# Altium PCB CCP_PCB3.PcbDoc
Units mil, origin at the board's own origin, x right, y up, seen from the top; angles counter-clockwise.
Board outline 3910 x 2580 mil, 2 copper layers (Top Layer, Bottom Layer); 78 components, 61 nets, 295 pads, 33 vias.
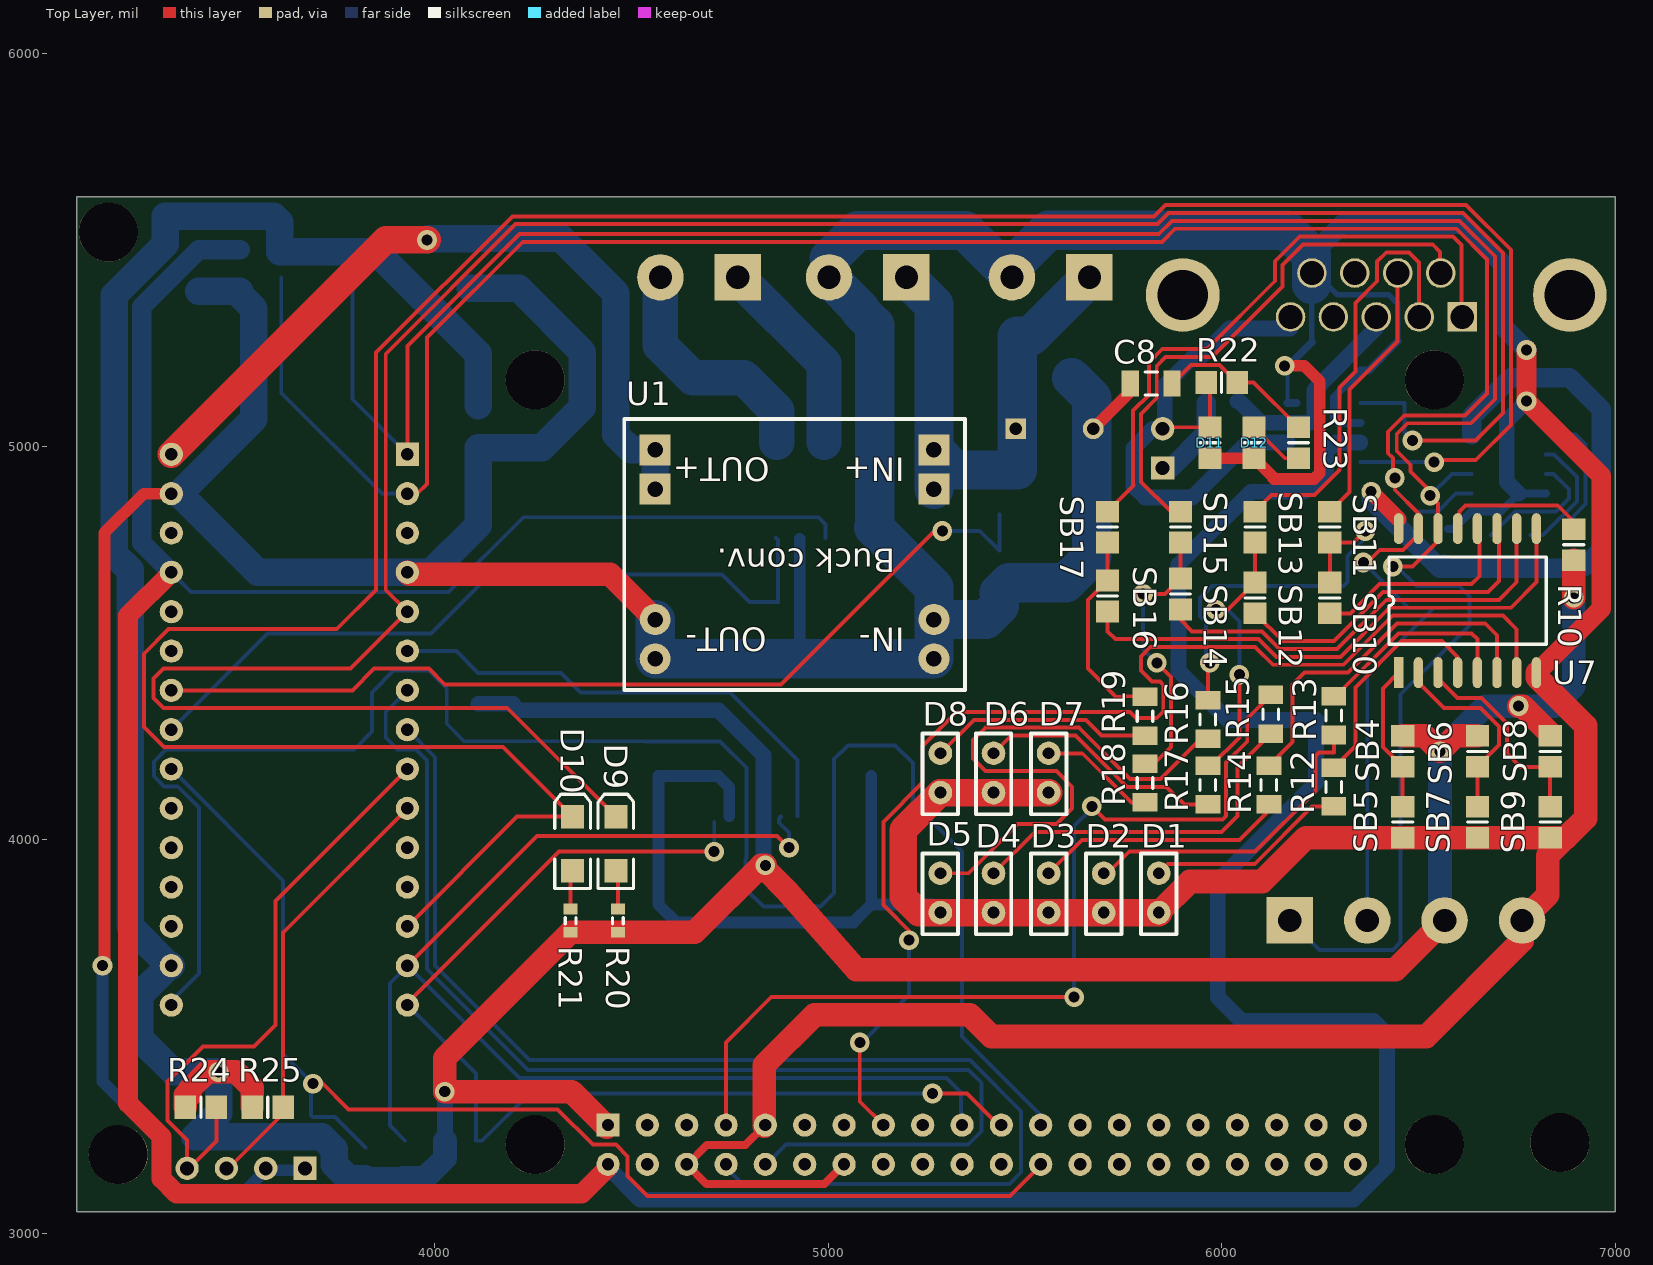
[diagram p0: Top Layer view]
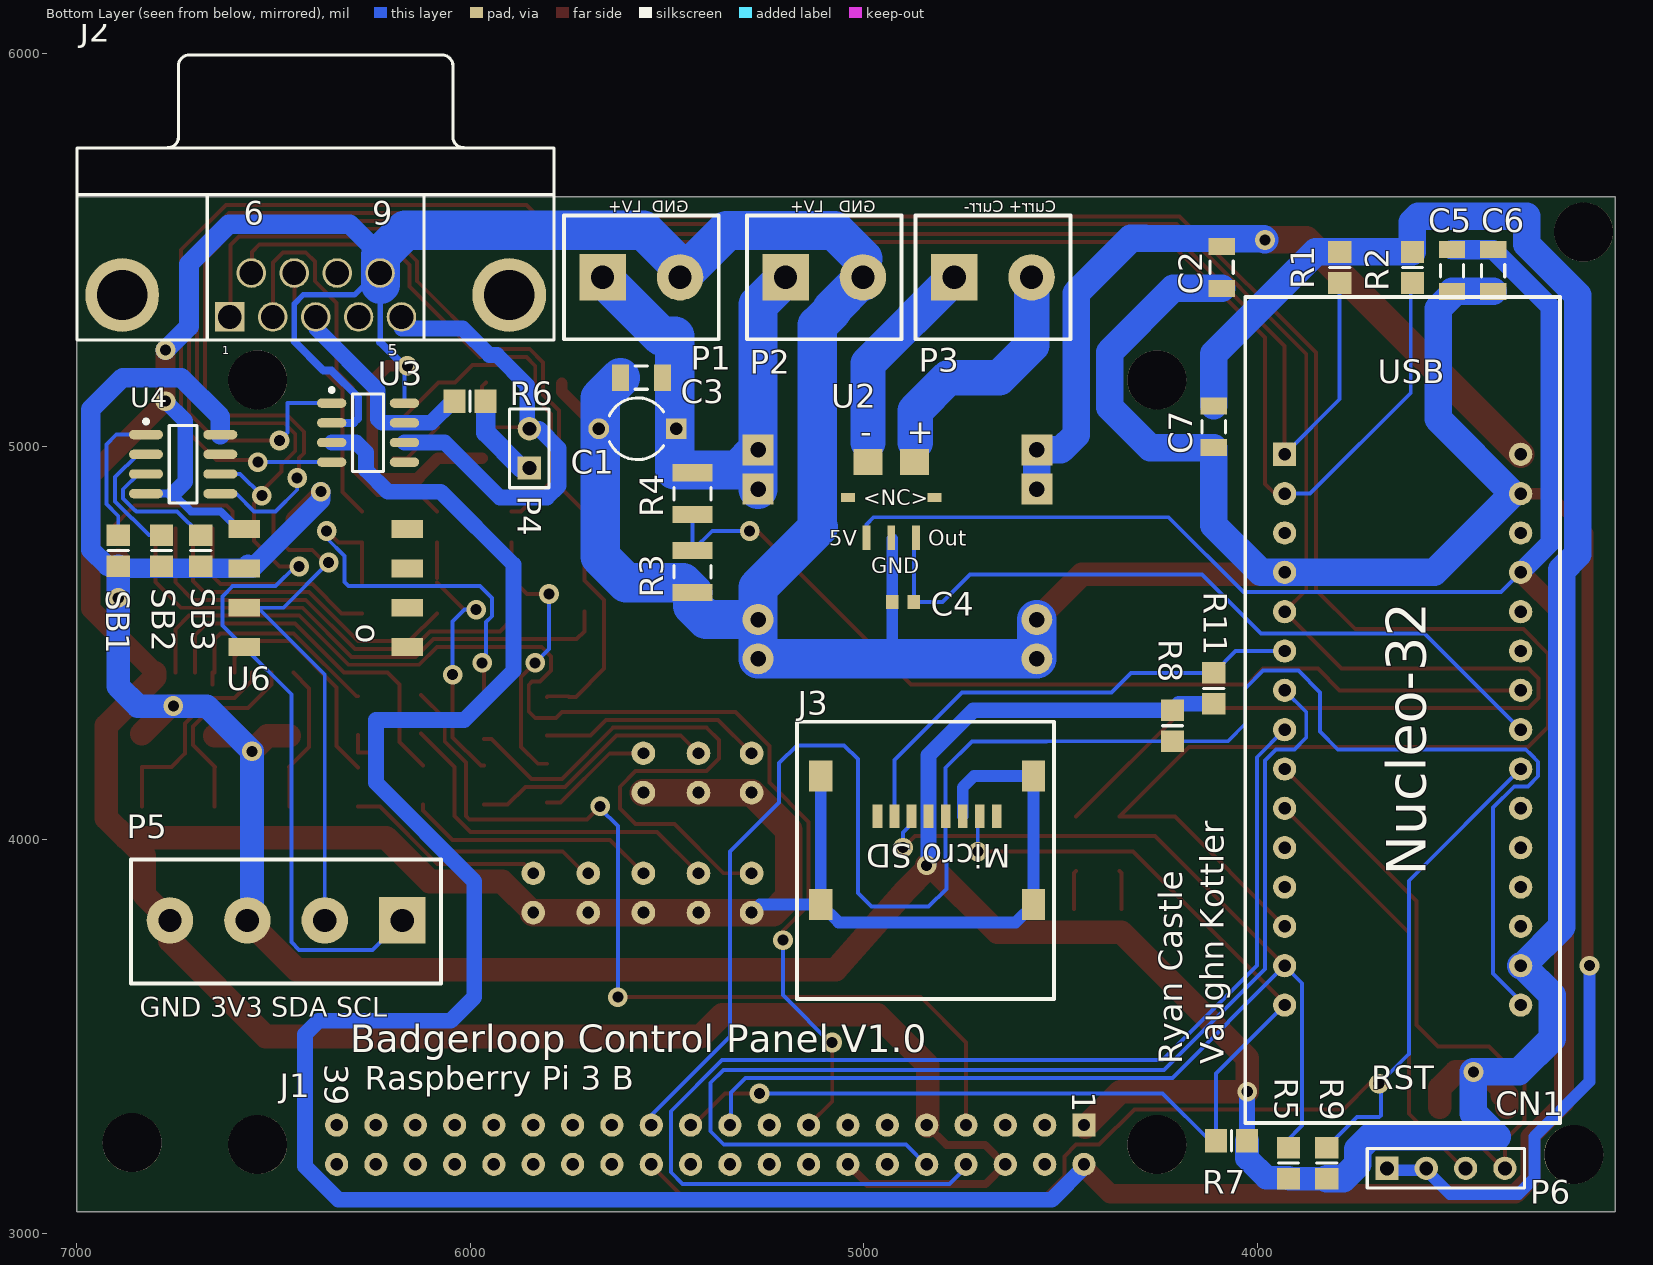
[diagram p1: Bottom Layer view, seen from below]

## Layer stack, top to bottom
Top Solder: solder mask 0.4, Solder Resist, Dk 3.5
Top Layer: signal copper 1.4
Dielectric 1: dielectric 12.6, FR-4, Dk 4.8
Bottom Layer: signal copper 1.4
Bottom Solder: solder mask 0.4, Solder Resist, Dk 3.5

## Board outline
3090,3055 7000,3055 7000,5635 3090,5635

## Design rules (kind name [scope] priority, off if disabled: settings)
Clearance [All] p1: gap=10 ignorepadtopadclearanceinfootprint=FALSE except(0: Arc-Hole Track-Hole SMDPad-Hole THPad-Hole Via-Hole Fill-Hole Poly-Hole Region-Hole Text-Hole)
HoleSize [All] p1: absolutevalues=TRUE maxlimit=200 minlimit=1 maxpercent=80.000 minpercent=20.000
PolygonConnect [All] p1: connectstyle=Relief reliefconductorwidth=10 reliefentries=4 polygonreliefangle="90 Angle" airgapwidth=10
RoutingVias [All] p1: holewidth=28 width=50 viastyle="Through Hole" minholewidth=28 minwidth=50 maxholewidth=28 maxwidth=50
SolderMaskExpansion [All] p1: expansion=4
Width [All] p1: maxlimit=150 minlimit=10 preferedwidth=10 minimp=50.000000 maximp=50.000000 favimp=50.000000
29 further rules are at their usual default settings.

## Classes and differential pairs
component class CCP_MCU: C1 C2 C3 C4 C5 C6 C8 CN1 D9 D10 D11 D12 J1 J2 P1 P2 P3 P4 R1 R2 R3 R4 R5 R6 R7 R8 R9 R20 R21 R22 R23 SB1 SB2 SB3 U1 U2 U3 U4
component class CCP_IO: C7 D1 D2 D3 D4 D5 D6 D7 D8 J3 P5 P6 R10 R11 R12 R13 R14 R15 R16 R17 R18 R19 R24 R25 SB4 SB5 SB6 SB7 SB8 SB9 SB10 SB11 SB12 SB13 SB14 SB15 SB16 SB17 U6 U7

## Components (designator, comment, footprint, x,y, rotation, side; value= is the part's Value field where it differs from the comment)
C1 "Cap" CAPR5-4X5 5575,5045 r0 bottom value=220uF
C2 "Cap" C1206 4090,5455 r90 bottom value=10uF
C3 "Cap" C1206 5565,5175 r180 bottom value=10uF
C4 "Cap Semi" 1608[0603] 4900,4605 r180 bottom value=100pF
C5 "Cap Semi" C1206 3504.44,5447.13 r270 bottom value=.1uF
C6 "Cap" C1206 3400,5447.13 r90 bottom value=10uF
C7 "Cap" C1206 4110,5050 r90 bottom value=10uF
C8 "Cap" C1206 5820.7,5160 r0 top value=10uF
CN1 "NUCLEO-L432KC" NUCLEO-32 3930,4980 r180 bottom
D1 "LED1" "2 Pin Jumper" 5840,3915 r270 top
D2 "LED1" "2 Pin Jumper" 5700,3915 r270 top
D3 "LED1" "2 Pin Jumper" 5560,3915 r270 top
D4 "LED1" "2 Pin Jumper" 5420,3915 r270 top
D5 "LED1" "2 Pin Jumper" 5285,3915 r270 top
D6 "LED1" "2 Pin Jumper" 5420,4220 r270 top
D7 "LED1" "2 Pin Jumper" 5560,4220 r270 top
D8 "LED1" "2 Pin Jumper" 5285,4220 r270 top
D9 "LED2" 3.2X1.6X1.1 4460,3990 r90 top
D10 "LED2" 3.2X1.6X1.1 4350,3990 r90 top
D11 "ESD DIODE" 6-0805_M 5970,5009.37 r90 top
D12 "ESD DIODE" 6-0805_M 6082.37,5009.37 r90 top
J1 "Raspberry Pi" "RASPBERRY PI - CCP OUTLINE" 6580,3615 r270 bottom
J2 "D Connector 9" DSUB1.385-2H9 6393.07,5759.02 r180 bottom
J3 "uSD" MICRO_SD_HOLDER 4661.77,4060 r0 bottom
P1 "V_BATT" "2POS TERM BLOCK" 5663.7,5430 r180 bottom
P2 "NAP" "2POS TERM BLOCK" 5198.7,5430 r180 bottom
P3 "Header 2H" "2POS TERM BLOCK" 4770,5430 r180 bottom
P4 "TERM" HDR1X2 5850,4945 r90 bottom
P5 "Header 4" "4POS TERM BLOCK" 6173.15,3795 r0 bottom
P6 "Header 4" HDR1X4 3670,3165 r180 bottom
R1 "Res1" 6-0805_M 3790,5455 r90 bottom value=1K
R2 "Res1" 6-0805_M 3605,5455 r90 bottom value=1K
R3 "SMD 1210" 14-1210 5435,4681.85 r270 bottom value=1K
R4 "SMD 1210" 14-1210 5435,4880 r270 bottom value=4.5K
R5 "Res1" 6-0805_M 3920,3178.13 r90 bottom value=47K
R6 "Res1" 6-0805_M 6000.63,5115 r0 bottom value=120
R7 "Res1" 6-0805_M 4065,3235 r0 bottom value=47K
R8 "Res1" 6-0805_M 4215,4290 r270 bottom value=47K
R9 "Res1" 6-0805_M 3823.13,3178.13 r270 bottom value=47K
R10 "Res1" 6-0805_M 6895,4750 r270 top value=10K
R11 "Res1" 6-0805_M 4110,4385 r90 bottom value=10K
R12 "Res1" 1206 6285,4085 r90 top value=1K
R13 "Res1" 1206 6285,4266.57 r90 top value=1K
R14 "Res1" 1206 6120,4090 r90 top value=1K
R15 "Res1" 1206 6125,4270 r90 top value=1K
R16 "Res1" 1206 5965,4256.57 r90 top value=1K
R17 "Res1" 1206 5965,4090 r90 top value=1K
R18 "Res1" 1206 5805,4095 r90 top value=1K
R19 "Res1" 1206 5805,4265 r90 top value=1K
R20 "Res3" J1-0603 4465,3794.53 r90 top value=1K
R21 "Res3" J1-0603 4345,3794.53 r90 top value=1K
R22 "Res1" 6-0805_M 6000,5162.4 r180 top value=120
R23 "Res1" 6-0805_M 6195,5009.37 r270 top value=120
R24 "Res1" 6-0805_M 3405,3320 r180 top value=2K
R25 "Res1" 6-0805_M 3575,3320 r180 top value=2K
SB1 "Res1" 6-0805_M 6895,4735 r270 bottom value=0
SB2 "Res1" 6-0805_M 6785,4735 r270 bottom value=0
SB3 "Res1" 6-0805_M 6685,4735 r270 bottom value=0
SB4 "Res1" 6-0805_M 6460,4225 r90 top value=0
SB5 "Res1" 6-0805_M 6460,4045 r90 top value=0
SB6 "Res1" 6-0805_M 6650,4225 r90 top value=0
SB7 "Res1" 6-0805_M 6650,4045 r90 top value=0
SB8 "Res1" 6-0805_M 6835,4225 r90 top value=0
SB9 "Res1" 6-0805_M 6835,4045 r90 top value=0
SB10 "Res1" 6-0805_M 6275,4615 r270 top value=0
SB11 "Res1" 6-0805_M 6275,4795 r270 top value=0
SB12 "Res1" 6-0805_M 6085,4615 r270 top value=0
SB13 "Res1" 6-0805_M 6085,4795 r270 top value=0
SB14 "Res1" 6-0805_M 5895,4625 r270 top value=0
SB15 "Res1" 6-0805_M 5895,4795 r270 top value=0
SB16 "Res1" 6-0805_M 5710,4620 r270 top value=0
SB17 "Res1" 6-0805_M 5710,4795 r270 top value=0
U1 "MP1584EN Breakout Board" "MP1584EN BREAKOUT" 5268.66,4460 r180 top
U2 "ACS780xLR" "7-PIN PSOF" 4930,4870 r180 bottom
U3 "MCP2561" SO8_L 6260,5035 r180 bottom
U4 "CAT24C32" SO8_N 6730,4955 r180 bottom
U6 "SSCMNNN030PA2A3" 8-SMT 6160.04,4790 r270 bottom
U7 "PCF8574" 16-SOIC 6450,4425 r90 top

## Footprints (in the part's own frame and the unit in brackets; to place one, negate y for a bottom-side part, rotate by r counter-clockwise, add the part's x,y. Pads: shape width x height; smd on the part's side, far side on the other; paste and mask are expansions set on the pad)
"2 Pin Jumper" [mil]
  round 60 hole 30: 1(0,0) 2(100,0)
  silkscreen extent -50,-45 155,45, body extent -50,-51 150,45, height 344
"2POS TERM BLOCK" [mm] "5mm Pitch"
  rect 3x3 hole 1.5: 1(0,0)
  round 3 hole 1.5: 2(5,0)
  silkscreen extent -2.5,-4 7.5,4, body extent -2.51,-4.57 8.09,4.43, height 12.6
3.2X1.6X1.1 [mm] "SMT LED; 2 Flat Leads"
  rect 1.5x1.5 smd: 1(-1.75,0) 2(1.75,0)
  silkscreen extent -2.9,-1.15 3.2,1.15
"4POS TERM BLOCK" [mm]
  rect 3x3 hole 1.5: 1(0,0)
  round 3 hole 1.5: 2(5,0) 3(10,0) 4(15,0)
  silkscreen extent -2.5,-3.94 17.5,4.06, body extent -2.55,-4.56 18.05,4.44, height 3.8
6-0805_M [mm] "Chip Resistor, Body 2.0x1.2mm, IPC Low Density"
  rect 1.4x1.5 smd: 1(-1,0) 2(1,0)
  silkscreen extent 0,-0.65 0,0.65, body extent -1.07,-0.7 1.07,0.7, height 0.7
"7-PIN PSOF" [mm] "ACS780xLR"
  rect 0.5x1.6 smd: 1(-1.6,-2.6) 2(0,-2.6) 3(1.6,-2.6)
  rect 0.9x0.6 smd: 4(2.8,0) 7(-2.8,0)
  rect 1.9x1.7 smd: 5(1.5,2.3) 6(-1.5,2.3)
8-SMT [mm]
  rect 1.15x2.04 smd: 1(0,-10.54) 2(2.54,-10.54) 3(5.08,-10.54) 4(7.62,-10.54) 5(7.62,0) 6(5.08,0) 7(2.54,0) 8(0,0)
  body extent -1.35,-12 8.55,1.46, height 5.44
14-1210 [mm] "Chip Resistor, Body 3.2x2.5mm, IPC High Density"
  rect 1.1x2.6 smd: 1(-1.35,0) 2(1.35,0)
  silkscreen extent -0.4,-1.2 0.4,1.2, body extent -1.68,-1.32 1.68,1.32, height 0.9
16-SOIC [mm]
  rect 2x0.6 smd: 1(0,0)
  oval 2x0.6 smd: 2(0,-1.27) 3(0,-2.54) 4(0,-3.81) 5(0,-5.08) 6(0,-6.35) 7(0,-7.62) 8(0,-8.89) 9(9.3,-8.89) 10(9.3,-7.62) 11(9.3,-6.35) 12(9.3,-5.08) 13(9.3,-3.81) 14(9.3,-2.54) 15(9.3,-1.27) 16(9.3,0)
  silkscreen extent 1.84,-9.53 7.46,0.64
1206 [mm] "1206 SMD Resistor"
  rect 1.2x1.6 smd: 1(0,0) 2(2.5,0)
  silkscreen extent 0.9,-0.5 1.6,0.5
1608[0603] [mm] "Chip Capacitor, Body 1.6x0.8mm, IPC High Density"
  rect 0.8x0.9 smd: 1(-0.7,0) 2(0.7,0)
  body extent -0.87,-0.48 0.87,0.48, height 1.3
C1206 [mm] "Chip Capacitor, Body 3.2x1.6mm, IPC High Density"
  rect 1.1x1.7 smd: 1(-1.35,0) 2(1.35,0)
  silkscreen extent -0.4,-0.75 0.4,0.75, body extent -1.7,-0.9 1.7,0.9, height 1.3
CAPR5-4X5 [mm] "Capacitor; 2 Leads"
  rect 1.35x1.35 hole 0.8: 1(-2.5,0)
  round 1.35 hole 0.8: 2(2.5,0)
  silkscreen extent -1.69,-2 1.82,2
DSUB1.385-2H9 [mm] "Connector; D Subminiature; 9 Position; Right Angle; Pitch 1.385 mm"
  rect 1.905x1.905 hole 1.524: 1(-5.54,-10.92)
  round 1.905 hole 1.524: 2(-2.77,-10.92) 3(0,-10.92) 4(2.77,-10.92) 5(5.54,-10.92) 6(-4.155,-8.08) 7(-1.385,-8.08) 8(1.385,-8.08) 9(4.155,-8.08)
  round 4.76 hole 3.26 unplated: 10(-12.495,-9.5) 11(12.495,-9.5)
  silkscreen extent -15.4,-12.4 15.4,6
HDR1X2 [mm] "Connector; Header; 2 Position"
  rect 1.5x1.5 hole 0.9: 1(0,0)
  round 1.5 hole 0.9: 2(2.54,0)
  silkscreen extent -1.27,-1.27 3.81,1.27
HDR1X4 [mm] "Connector; Header; 4 Position"
  rect 1.5x1.5 hole 0.9: 1(0,0)
  round 1.5 hole 0.9: 2(2.54,0) 3(5.08,0) 4(7.62,0)
  silkscreen extent -1.27,-1.27 8.89,1.27
J1-0603 [mm] "Chip Resistor, Body 1.6x0.8mm, IPC High Density"
  rect 0.7x0.9 smd: 1(-0.75,0) 2(0.75,0)
  silkscreen extent -0.2,-0.35 0.2,0.35, body extent -0.85,-0.48 0.85,0.48, height 0.9
MICRO_SD_HOLDER [mm]
  rect 0.63x1.5 smd: 1(7.7,0) 2(6.6,0) 3(5.5,0) 4(4.4,0) 5(3.3,0) 6(2.2,0) 7(1.1,0) 8(0,0)
  rect 1.5x2 smd: 9(-2.38,-2.6) 9(-2.38,5.7) 9(11.37,-2.6) 9(11.37,5.7)
  silkscreen extent -3.7,-6.1 12.9,11.8
"MP1584EN BREAKOUT" [mm] "Buck Converter"
  round 2 hole 1: 0(0,0) 0(0,-2.54) 2(18,-2.54) 2(18,0)
  rect 2x2 hole 1: 1(0,-10.96) 1(0,-13.5) 3(18,-10.96) 3(18,-13.5)
  silkscreen extent -2,-15.5 20,2
NUCLEO-32 [mm]
  rect 1.5x1.5 hole 0.8: 1(0,0)
  round 1.5 hole 0.8: 2(0,-2.54) 3(0,-5.08) 4(0,-7.62) 5(0,-10.16) 6(0,-12.7) 7(0,-15.24) 8(0,-17.78) 9(0,-20.32) 10(0,-22.86) 11(0,-25.4) 12(0,-27.94) 13(0,-30.48) 14(0,-33.02) 15(0,-35.56) 16(15.24,-35.56) 17(15.24,-33.02) 18(15.24,-30.48) 19(15.24,-27.94) 20(15.24,-25.4) 21(15.24,-22.86) 22(15.24,-20.32) 23(15.24,-17.78) 24(15.24,-15.24) 25(15.24,-12.7) 26(15.24,-10.16) 27(15.24,-7.62) 28(15.24,-5.08) 29(15.24,-2.54) 30(15.24,0)
  silkscreen extent -2.54,-43.18 17.78,10.16, body extent -1.67,-40.6 16.87,9.69, height 5
"RASPBERRY PI - CCP OUTLINE" [mm]
  rect 1.5x1.5 hole 0.8: 1(8.636,54.356)
  round 1.5 hole 0.8: 2(11.176,54.356) 3(8.636,51.816) 4(11.176,51.816) 5(8.636,49.276) 6(11.176,49.276) 7(8.636,46.736) 8(11.176,46.736) 9(8.636,44.196) 10(11.176,44.196) 11(8.636,41.656) 12(11.176,41.656) 13(8.636,39.116) 14(11.176,39.116) 15(8.636,36.576) 16(11.176,36.576) 17(8.636,34.036) 18(11.176,34.036) 19(8.636,31.496) 20(11.176,31.496) 21(8.636,28.956) 22(11.176,28.956) 23(8.636,26.416) 24(11.176,26.416) 25(8.636,23.876) 26(11.176,23.876) 27(8.636,21.336) 28(11.176,21.336) 29(8.636,18.796) 30(11.176,18.796) 31(8.636,16.256) 32(11.176,16.256) 33(8.636,13.716) 34(11.176,13.716) 35(8.636,11.176) 36(11.176,11.176) 37(8.636,8.636) 38(11.176,8.636) 39(8.636,6.096) 40(11.176,6.096)
  round 3.81 hole 3.81 unplated: H(9.906,1.005) H(9.906,59.066)
  body extent -44.83,-24.43 13.52,62.57, height 18.23
SO8_L [mm] "SOIC, 8-Leads, Body 4.9x3.9mm, Pitch 1.27mm, IPC High Density"
  oval 1.9x0.6 smd: 1(-2.35,1.905) 2(-2.35,0.635) 3(-2.35,-0.635) 4(-2.35,-1.905) 5(2.35,-1.905) 6(2.35,-0.635) 7(2.35,0.635) 8(2.35,1.905)
  silkscreen extent -2.48,-2.5 1,2.88, body extent -2,-2.5 2,2.5, height 1.75
SO8_N [mm] "SOIC, 8-Leads, Body 4.9x3.9mm, Pitch 1.27mm, IPC Medium Density"
  oval 2.2x0.6 smd: 1(-2.4,1.905) 2(-2.4,0.635) 3(-2.4,-0.635) 4(-2.4,-1.905) 5(2.4,-1.905) 6(2.4,-0.635) 7(2.4,0.635) 8(2.4,1.905)
  silkscreen extent -2.53,-2.5 0.9,2.88, body extent -2,-2.5 2,2.5, height 1.75

## Part data
C1 C2 C3 C6 C7 C8: "Capacitor", LatestRevisionDate=17-Jul-2002, LatestRevisionNote="Re-released for DXP Platform.", PackageDescription="Radial Cap, Thru-Hole; 2 Leads; 0.3 in Pin Spacing", PackageReference=RAD-0.3, Published=8-Jun-2000, Publisher="Altium Limited"
C4 C5: "Capacitor (Semiconductor SIM Model)", LatestRevisionDate=29-May-2009, LatestRevisionNote="IPC-7351 Footprint Added.", PackageDescription="Chip Capacitor", PackageReference=C1206, Published=8-Jun-2000, Publisher="Altium Limited"
CN1: "STM32L432KC Development Board", ComponentLink1Description=MBED, ComponentLink1URL=https://os.mbed.com/platforms/ST-Nucleo-L432KC/, ComponentLink2Description=Digikey, ComponentLink2URL=https://www.digikey.com/products/en?keywords=NUCLEO-L432KC
D1 D2 D3 D4 D5 D6 D7 D8: "Typical RED GaAs LED", LatestRevisionDate=08-Jul-2005, LatestRevisionNote="Mech Layer 1 removed.", PackageDescription="LED; 2 Leads", PackageReference=LED-1, Published=8-Jun-2000, Publisher="Altium Limited"
D9 D10: "Typical RED, GREEN, YELLOW, AMBER GaAs LED", LatestRevisionDate=17-Jul-2002, LatestRevisionNote="Re-released for DXP Platform.", PackageDescription="SM LED; 2 Flat Leads", PackageReference=3.2X1.6X1.1, PackageVersion=Feb-2002, Published=8-Jun-2000, Publisher="Altium Limited"
D11 D12: library part "D Zener", "Zener Diode", LatestRevisionDate=17-Jul-2002, LatestRevisionNote="Re-released for DXP Platform.", PackageDescription="Diode, Thru-Hole; 2 Leads; 0.7 in Pin Spacing", PackageReference=DIODE-0.7, Published=8-Jun-2000, Publisher="Altium Limited"
J1: "2x20 Header"
J2: "Receptacle Assembly, 9 Position, Right Angle", PackageDocument=O, DatasheetDocument=1-Sep-1999, Gender=Receptacle, LatestRevisionDate=17-Jul-2002, LatestRevisionNote="Re-released for DXP Platform.", Orientation="Right Angle", PackageReference=788750, Positions=9, Published=15-Jun-2001, Publisher="Altium Limited"
J3: library part "SD Card"
P1 P2 P4: library part "Header 2", "Header, 2-Pin", LatestRevisionDate=17-Jul-2002, LatestRevisionNote="Re-released for DXP Platform.", Publisher="Altium Limited"
P3: "Header, 2-Pin, Right Angle", LatestRevisionDate=17-Jul-2002, LatestRevisionNote="Re-released for DXP Platform.", Publisher="Altium Limited"
P5 P6: "Header, 4-Pin", LatestRevisionDate=17-Jul-2002, LatestRevisionNote="Re-released for DXP Platform.", Publisher="Altium Limited"
R1 R2 R5 R6 R7 R8 R9 R10 R11 R12 R13 R14 R15 R16 R17 R18 R19 R20 R21 R22 R23 R24 R25 SB1 SB2 SB3 SB4 SB5 SB6 SB7 SB8 SB9 SB10 SB11 SB12 SB13 SB14 SB15 SB16 SB17: "Resistor", Published=8-Jun-2000, Publisher="Altium Limited"
  R1 R2 R5 R6 R7 R8 R9 R10 R11 R12 R13 R14 R15 R16 R17 R18 R19 R22 R23 R24 R25 SB1 SB2 SB3 SB4 SB5 SB6 SB7 SB8 SB9 SB10 SB11 SB12 SB13 SB14 SB15 SB16 SB17: LatestRevisionDate=17-Jul-2002, LatestRevisionNote="Re-released for DXP Platform.", PackageDescription="Axial Device, Thru-Hole; 2 Leads; 0.3 in Pin Spacing", PackageReference=AXIAL-0.3
  R20 R21: LatestRevisionDate=29-May-2009, LatestRevisionNote="IPC-7351 Footprint Added.", PackageDescription="Chip Resistor", PackageReference=J1-0603
R3 R4: library part Res1, "Resistor", LatestRevisionDate=17-Jul-2002, LatestRevisionNote="Re-released for DXP Platform.", PackageDescription="Axial Device, Thru-Hole; 2 Leads; 0.3 in Pin Spacing", PackageReference=AXIAL-0.3, Published=8-Jun-2000, Publisher="Altium Limited"
U1: "Buck Converter", ComponentLink1Description=Part, ComponentLink1URL=https://www.amazon.com/eBoot-MP1584EN-Converter-Adjustable-Module/dp/B01MQGMOKI/
U2: "Hall-Effect Current Sensor", ComponentLink1Description=Part, ComponentLink1URL=https://www.digikey.com/product-detail/en/allegro-microsystems-llc/ACS780LLRTR-050B-T/620-1817-1-ND/6189106
U3: "CAN Transciever", ComponentLink1Description=Part, ComponentLink1URL=https://www.digikey.com/product-detail/en/microchip-technology/MCP2561-E-SN/MCP2561-E-SN-ND/4079961, ComponentLink2Description=Datasheet, ComponentLink2URL=http://ww1.microchip.com/downloads/en/DeviceDoc/20005167C.pdf
U4: "I2C EEPROM", ComponentLink1Description=Part, ComponentLink1URL=https://www.digikey.com/product-detail/en/on-semiconductor/CAT24C32WI-GT3/CAT24C32WI-GT3CT-ND/1631159, ComponentLink2Description=Datasheet, ComponentLink2URL=http://www.onsemi.com/pub/Collateral/CAT24C32-D.PDF
U6: "Honeywell Digital Pressure Sensor", ComponentLink1Description=Part, ComponentLink1URL=https://www.digikey.com/product-detail/en/honeywell-sensing-and-productivity-solutions/SSCMNNN030PA2A3/480-6407-ND/2416123, ComponentLink2Description=Datasheet, ComponentLink2URL=https://sensing.honeywell.com/index.php?ci_id=151134
U7: "I2C I/O Expander", ComponentLink1Description=Part, ComponentLink1URL=https://www.digikey.com/product-detail/en/texas-instruments/PCF8574DWR/296-13108-1-ND/484579, ComponentLink2Description=Datasheet, ComponentLink2URL=http://www.ti.com/lit/ds/symlink/pcf8574.pdf

## Free pads (board coordinates)
  round 150 hole 150 unplated: H(3170,5545) H(3195,3200) H(4254.57,5169) H(6540.43,5169) H(6860,3230)

## Via types
v1: diameter 50, hole 28, Top Layer to Bottom Layer, 33 vias

## Nets (pads, with @x,y where several pads share a name; then routed paths per layer and width w, separated by ;. In a path a pad name is that pad's centre, name@x,y a point inside that pad or via, vN(x,y) a via of type N, cw(c..) or ccw(c..) an arc to the next point about the centre after c; other vN are vias at no path point)
CAN1_H: J2.3 R6.2 U3.7 | length 516.9
  Bottom Layer w40: R6.2 6045,5115 6100,5060 U3.7 6225,5060 6235,5070 6235,5143.11 J2.3@6391.89,5300
CAN1_L: D11.2 J2.5 P4.2 R22.2 U3.6 | length 1383.6
  Top Layer w10: P4.2 5853.74,5048.74 D11.2 5970,5153.03 R22.2
  Bottom Layer w10: P4.2 P4.2@5855,5050
  Bottom Layer w40: P4.2 5825,5045 5775,4995 5775,4900 5805,4870 5925,4870 6065,5010 U3.6 ; P4.2@5855,5050 5855,5155 5932.2,5232.2 5951.2,5232.2 6018.99,5300 J2.5@6173.78,5300
CAN1_RX: CN1.13 D10.2 U3.4 | length 7130.5
  Top Layer w10: CN1.13 4208.9,4058.9 D10.2 4173.43,4235.47 3311.56,4235.47 3260,4287.03 3260,4472.97 3322.5,4535.47 3750.47,4535.47 3850,4635 3850,5238.28 4196.72,5585 5828.43,5585 5856.84,5613.41 6621.59,5613.41 6735,5500 6735,5055 6645,4965 6540,4965 6535,4960 v1(6540,4960)
  Bottom Layer w10: U3.4 v1(6540,4960)
CAN1_TX: CN1.5 D9.2 U3.1 | length 6655
  Top Layer w10: D9.2 4183.9,4335 3310,4335 3285,4360 3285,4410 3310.47,4435.47 3785.47,4435.47 CN1.5 3875,4635 3875,5235 4205,5565 5836.72,5565 5865.12,5593.41 6613.31,5593.41 6715,5491.72 6715,5085 6645,5015 v1(6485,5015)
  Bottom Layer w10: U3.1 6465,5110 6465,5035 v1(6485,5015)
CURR_SENSE: C4.2 CN1.23 U2.3 | length 1899.9
  Bottom Layer w10: CN1.23 3574.53,4524.53 3989.53,4524.53 4140,4675 4730,4675 4800,4605 C4.2 4872.44,4762.2 U2.3
GND: C1.2 C2.1 C3.1 C4.1 C5.2 C6.1 C7.1 C8.1 CN1.4 CN1.29 D1.2 D2.2 D3.2 D4.2 D5.2 D6.2 D7.2 D8.2 D11.1 D12.1 J1.6 J1.9 J1.14 J2.9 J3.6 J3.9 P1.2 P2.2 P5.4 P6.1 P6.2 R3.2 SB5.1 SB7.1 SB9.1 U1.0 U1.2 U2.2 U3.2 U3.8 U4.4 U6.1 U7.8 | length 22218
  Top Layer w10: J1.6 J1.6@4641.12,3173.88 ; 6130,4920 6130,4922.37 ; P5.4@6763.7,3743.7 P5.4
  Top Layer w20: J1.6@4637.24,3170 J1.6@4641.12,3173.88 ; J1.9 4837.24,3272.24 4789.53,3224.53 4691.77,3224.53 J1.6@4641.12,3173.88 ; J1.14 4990,3125 4690,3125 J1.6@4641.12,3173.88
  Top Layer w30: v1(3155,3680) 3160,3685 3160,4780 3260,4880 CN1.29 ; C1.2 5767.55,5139.12 C8.1 ; D11.1 D12.1 6130,4922.37 ; 6130,4920 6132.56,4917.44 6235.01,4917.44 6235.01,4917.57 6249.53,4932.09 6249.53,5165.47 6210,5205 v1(6160,5205)
  Top Layer w50: v1(6775,5245) v1(6775,5115) 6965,4925 6965,4588.19 U7.8@6801.81,4425
  Top Layer w60: CN1.4 3935,4675 4445,4675 U1.2@4560,4560 ; J1.9@4837.24,3272.24 4837.24,3427.24 4965,3555 5360,3555 5415,3500 6520,3500 P5.4@6763.7,3743.7 ; D1.2 5919.06,3894.06 6102.69,3894.06 6214.27,4005.63 SB5.1 SB7.1 SB9.1 6874.37,4005.63 ; P5.4 6828.7,3860 6828.7,3959.96 6874.37,4005.63 ; U7.8@6801.81,4425 6801.81,4413.19 6925,4290 6925,4055 6875.63,4005.63 6874.37,4005.63
  Top Layer w70: D7.2 D6.2 D8.2 5190,4025 5190,3855 5230,3815 D5.2 D4.2 D3.2 D2.2 D1.2
  Bottom Layer w10: 4927.56,4462.44 4930,4460 ; U2.2@4927.56,4765.2 U2.2 ; P2.2@5001.85,5420 P2.2 P2.2@5001.85,5476.85 ; D5.2@5264.41,3835.59 D5.2 ; P1.2 P1.2@5466.85,5431.85 ; v1(6160,5205) 6167.48,5197.52 U3.8 ; J2.9 J2.9@6239.09,5440.91
  Bottom Layer w14: J2.9@6228.31,5411.81 6229.19,5410.93 6229.46,5410.93 6229.46,5302.28 6229.19,5302.01 6229.19,5265 ; J2.9@6239.09,5440.91 6295,5385 6425,5385 6447.63,5362.37 6447.63,5306.47 6447.68,5306.42 6447.68,5267.32
  Bottom Layer w20: v1(6160,5205) 6169.19,5205 6229.19,5265 ; U3.8 U3.8@6189.88,5110 ; U3.2 6296.08,5060 6285,5071.08 6285,5125 6352.64,5192.64 6372.99,5192.64 6447.68,5267.32 ; U6.1 6590,4790 6635,4835 6710.27,4835 6755.27,4880 U4.4
  Bottom Layer w30: v1@3155,3660 3155,3385 3295,3245 3295,3140 3335,3100 3510,3100 3570,3160 P6.1@3670,3160 ; J3.6 4748.39,4133.39 4719.41,4162.36 4568.07,4162.36 4568.07,3835.59 4613.66,3790 5063.82,3790 J3.9@5109.41,3835.59 ; 4927.56,4462.44 C4.1 U2.2@4927.56,4765.2 ; J3.9@5109.41,4162.36 J3.9@5109.41,3835.59 ; D5.2@5264.41,3835.59 J3.9@5109.41,3835.59
  Bottom Layer w40: 6755.27,4880 6725,4910.27 6725,5065 v1(6775,5115)
  Bottom Layer w50: 6228.31,5486.69 6306.61,5565 6613.43,5565 6715,5463.43 6715,5305 v1(6775,5245)
  Bottom Layer w70: C6.1 C5.2@3496.02,5393.98 ; C5.2 C5.2@3496.02,5393.98 ; C2.1 4213.15,5401.85 4375,5240 4375,5100 4271.85,4996.85 C7.1 4110,4800 3990,4680 CN1.4 3550,4680 3350,4880 3540,5070 3540,5350 C5.2@3496.02,5393.98
  Bottom Layer w100: U1.2@4560,4560 4560,4460 4930,4460 5268.66,4460 U1.0@5268.66,4560 ; P2.2@5001.85,5420 5010,5420 5079.65,5350.35 5079.65,5346.09 5117.95,5307.78 5117.95,4797.95 5115,4795 5268.66,4641.34 U1.0@5268.66,4560 ; P2.2@5001.85,5476.85 5074.06,5549.06 5347.8,5549.06 P1.2 ; 5435,4595 5400,4560 U1.0@5268.66,4560 ; R3.2 5459.65,4653.35 5603.19,4653.35 5670,4720.16 5670,5123.15 C3.1 ; P1.2@5466.85,5431.85 5470,5435 5470,5460 5560,5550 6165,5550 6228.31,5486.69 J2.9@6228.31,5411.81
GPIO1: J1.15 U7.7 | length 3103.2
  Top Layer w10: v1(5080,3485) 5080,3335 J1.15 ; v1@5209.29,3759.29 5209.29,3765 5140,3834.29 5140,4045.71 5240,4145.71 5240,4238.64 5326.36,4325 5767.09,4325 5782.09,4310 5835,4310 5851.5,4326.5 5851.5,4393.26 5842.71,4402.05 5822.95,4402.05 5795,4430 5795,4466.57 5818.43,4490 6085,4490 6130,4445 6309.85,4445 6434.85,4570 6715,4570 6750,4535 U7.7
  Bottom Layer w10: v1@5075,3475 5205,3605 v1(5205,3745)
I2C1_SCL: CN1.1 P5.1 R1.1 U4.6 U6.4 U7.14 | length 6452.1
  Top Layer w10: CN1.1 3930,5255 4215,5540 5840,5540 5873.41,5573.41 6605.03,5573.41 6695,5483.43 6695,5120 6634,5059 6472.43,5059 6445,5031.57 6445,4988.43 6480,4953.43 6480,4936.57 6530,4886.57 v1(6530,4875) 6550,4855 U7.14 6550,4760 6485,4695 v1(6435,4695)
  Bottom Layer w10: R1.1@3789.37,5430 3790,5429.37 R1.1 3790,5120 CN1.1 ; P5.1 6248.15,3720 6435,3720 6455,3740 6455,4370 U6.4 6630.16,4545.16 6630.16,4618.85 6604.01,4645 6495,4645 6445,4695 v1(6435,4695) ; v1(6530,4875) 6585,4930 U4.6
I2C1_SDA: CN1.2 P5.2 R2.1 U4.5 U6.3 U7.15 | length 6491.1
  Top Layer w10: CN1.2 3955,4880 3980,4905 3980,5276.72 4223.28,5520 5848.28,5520 5881.69,5553.41 6596.74,5553.41 6675,5475.15 6675,5135 6619,5079 6464.15,5079 6422.5,5037.35 6422.5,4982.65 6435,4970.15 6435,4925 v1(6440,4920) 6440,4890 6500,4830 U7.15 6500,4775.67 6461.11,4736.77 6401.77,4736.77 6370,4705 v1(6360,4705)
  Bottom Layer w10: R2.1@3609.37,5430 3609.37,5135.63 3865,4880 CN1.2 ; v1(6360,4705) 6475,4590 U6.3@6540,4590 ; P5.2 6370,4420 U6.3@6540,4590 ; v1@6445,4920 v1(6440,4920) 6440,4890 6495,4835 6550,4835 6595,4880 U4.5 ; U6.3 U6.3@6540,4590
IO_A0: SB4.1 SB5.2 U7.1 | length 378.5
  Top Layer w10: U7.1 6410,4385 6410,4236.07 6460.44,4185.63 SB4.1 SB5.2
IO_A1: SB6.1 SB7.2 U7.2 | length 496.2
  Top Layer w10: U7.2@6505,4395 6565,4335 6657.67,4335 6705,4287.67 6705,4241.07 6649.56,4185.63 SB6.1 SB7.2 ; U7.2@6505,4400 U7.2@6505,4425
IO_A2: SB8.1 SB9.2 U7.3 | length 531.9
  Top Layer w10: U7.3@6555,4404.52 6599.52,4360 6660.95,4360 6725,4295.95 6725,4220 6759.37,4185.63 SB8.1 SB9.2 ; U7.3@6555,4409.52 U7.3@6555,4425
LED0: R12.2 U7.4 | length 592
  Top Layer w10: R12.2 6340,4238.43 6340,4387.39 6457.61,4505 6560,4505 6600,4465 U7.4
LED1: R13.2 U7.5 | length 552.5
  Top Layer w10: R13.2 6289.32,4365 6449.32,4525 6635,4525 6650,4510 U7.5 ; U7.5@6655,4395 U7.5@6655,4425
LED2: R14.2 U7.6 | length 923.1
  Top Layer w10: R14.2 6180,4248.43 6180,4395 6210,4425 6321.04,4425 6335,4438.96 6446.04,4550 6670,4550 6700,4520 U7.6
LED3: J1.7 R15.2 | length 2350.6
  Top Layer w10: J1.7 4740,3485 4855,3600 v1(5625,3600) ; v1(5670,4085) 5703.62,4051.38 6002.71,4051.38 6011.5,4060.16 6011.5,4196.5 6065,4250 6065,4308.43 R15.2
  Bottom Layer w10: v1@5625,3610 5625,4035 5670,4080 v1(5670,4085)
LED4_I2C: SB10.2 U7.12 | length 540.2
  Top Layer w10: SB10.2 6327.35,4575.63 6401.72,4650 6635,4650 6655,4670 U7.12@6655,4791.14
LED4_IN: J2.7 SB11.1 | length 678
  Top Layer w10: SB11.1 6325,4884.37 6325,5145 6446.42,5266.42 6446.42,5439.72 J2.7
LED5_I2C: SB12.2 U7.11 | length 845.6
  Top Layer w10: SB12.2 6155.63,4505 6285,4505 6410,4630 6676.72,4630 6705,4658.28 U7.11@6705,4791.14
LED5_IN: J2.2 SB13.1 | length 1094.3
  Top Layer w10: SB13.1 6126.9,4876.27 6236.27,4876.27 6300,4940 6300,5150 6340,5190 6340,5365 6395,5420 6395,5470 6418.41,5493.41 6476.59,5493.41 6502.13,5467.87 J2.2
LED6_I2C: SB14.2 U7.10 | length 1118.3
  Top Layer w10: SB14.2 5895,4560 5925,4530 6102.35,4530 6147.35,4485 6293.28,4485 6418.28,4610 6705,4610 6750,4655 U7.10
LED6_IN: J2.6 SB15.1 | length 1413.8
  Top Layer w10: SB15.1 5870.63,4834.37 5795,4910 5795,5082.84 5835,5122.84 5835,5205 5857.2,5227.2 5975.44,5227.2 6155,5406.76 6155,5461.72 6206.69,5513.41 6536.59,5513.41 6555.47,5494.53 J2.6@6555.47,5411.81
LED7_I2C: SB16.2 U7.9 | length 1382.4
  Top Layer w10: SB16.2 5710,4530 5730,4510 6094.06,4510 6139.06,4465 6301.57,4465 6426.57,4590 6735,4590 6800,4655 U7.9
LED7_IN: J2.1 SB17.1 | length 1601.1
  Top Layer w10: SB17.1 5776.17,4900.54 5775,4901.72 5775,5091.12 5815,5131.12 5815,5213.28 5848.92,5247.2 5962.2,5247.2 6135,5420 6135,5470 6198.41,5533.41 6588.46,5533.41 6610,5511.86 J2.1@6610,5300
LV_BATT+: C1.1 C3.2 P1.1 P2.1 R4.1 U1.1 | length 1386.6
  Bottom Layer w100: P2.1 5268.66,5360.04 5268.66,4991.5 U1.1@5269.53,4990.63 ; U1.1@5268.66,4891.5 U1.1@5269.53,4990.63 ; U1.1@5269.09,4991.93 5269.53,4991.49 U1.1@5269.53,4990.63 ; P1.1 5513.7,5280 5480,5280 5480,4940 5320.16,4940 U1.1@5269.53,4990.63
NetC8_2: C8.2 R22.1 R23.1 | length 406.3
  Top Layer w10: C8.2 5875,5160 5922.2,5207.2 5994.57,5207.2 R22.1 6081.34,5162.4 R23.1
NetD1_1: D1.1 R12.1 | length 515.4
  Top Layer w10: D1.1 5864.06,3939.06 6084.06,3939.06 6230,4085 R12.1
NetD2_1: D2.1 R13.1 | length 809.3
  Top Layer w10: D2.1 5710,3915 5765,3970 6085,3970 6238.5,4123.5 6238.5,4213.26 6247.29,4222.05 6285,4222.05 R13.1
NetD3_1: D3.1 R14.1 | length 641.3
  Top Layer w10: D3.1 5645,4000 6045,4000 6120,4075 R14.1
NetD4_1: D4.1 R15.1 | length 925
  Top Layer w10: D4.1 5525,4020 5999.62,4020 6040,4060.38 6040,4185 R15.1
NetD5_1: D5.1 R16.1 | length 1492.3
  Top Layer w10: D5.1 5356.36,3915 5481.36,4040 5580,4040 5620,4080 5620,4135 5580,4175 5400,4175 5368.28,4206.72 5368.28,4253.28 5400,4285 5637.09,4285 5767.29,4154.8 5844.8,4154.8 5946.57,4256.57 R16.1
NetD6_1: D6.1 R17.1 | length 636.1
  Top Layer w10: D6.1 5465,4265 5628.81,4265 5759,4134.8 5860.2,4134.8 5905,4090 R17.1
NetD7_1: D7.1 R18.1 | length 296.8
  Top Layer w10: D7.1 5645.52,4220 5770.52,4095 R18.1
NetD8_1: D8.1 R19.1 | length 571.8
  Top Layer w10: D8.1 5370,4305 5655,4305 5695,4265 R19.1
NetD9_1: D9.1 R20.2 | length 99.1
  Top Layer w10: D9.1 4465,3916.1 R20.2
NetD10_1: D10.1 R21.2 | length 99.1
  Top Layer w10: R21.2 4345,3916.1 D10.1
NetD12_2: D12.2 R23.2 | length 145.2
  Top Layer w10: D12.2 6161.11,4970 R23.2
NetP4_1: P4.1 R6.1 | length 222.9
  Bottom Layer w10: P4.1 P4.1@5870.63,4945
  Bottom Layer w50: P4.1@5870.63,4945 5960.63,5035 R6.1@5960.63,5110
NetR10_1: R10.1 U7.13 | length 385.2
  Top Layer w10: U7.13@6605,4791.14 6605,4835 6620,4850 6854.37,4850 R10.1@6915,4789.37
NetR16_2: R16.2 SB10.1 SB11.2 | length 1056.1
  Top Layer w10: R16.2 5965,4445 v1(5970,4450) ; SB10.1 SB11.2 6335.63,4755.63 v1(6365,4785)
  Bottom Layer w10: v1(5970,4450) v1@5960,4450 ; v1(6365,4785) 6365,4766.57 6320,4721.57 6320,4655 6310,4645 5975,4645 5945,4615 5945,4568.43 5960,4553.43 v1@5960,4450 ; v1@5960,4450 5960,4440 5950,4450 v1@5960,4450
NetR17_2: R17.2 SB12.1 SB13.2 | length 696.3
  Top Layer w10: R17.2 5973.19,4188.43 6045,4260.24 v1(6045,4420) ; v1(5985,4585) 6015.63,4585 SB12.1 ; SB12.1@6085,4665 SB13.2
  Bottom Layer w10: v1(5985,4585) 6015,4585 6045,4555 v1(6045,4420)
NetR18_2: R18.2 SB14.1 SB15.2 | length 705
  Top Layer w10: v1(5800,4625) 5855.63,4625 SB14.1 SB15.2 ; R18.2 5828.43,4193.43 5871.5,4236.5 5871.5,4413.5 v1(5835,4450)
  Bottom Layer w10: v1(5800,4625) 5800,4485 v1(5835,4450)
NetR19_2: R19.2 SB16.1 SB17.2 | length 517.3
  Top Layer w10: SB17.2 SB16.1 5660,4609.37 5660,4435 5731.57,4363.43 5748.64,4363.43 5750.22,4365 5803.43,4365 R19.2
NetSB1_1: SB1.1 U4.1 | length 313.9
  Bottom Layer w10: U4.1@6864.49,5030 6900,5030 6925,5005 6925,4853.43 6895,4823.43 SB1.1
NetSB2_1: SB2.1 U4.2 | length 318
  Bottom Layer w10: SB2.1 6816.7,4774.37 6859.26,4816.93 6860.21,4816.93 6902.8,4859.51 6902.8,4922.2 6845,4980 U4.2
NetSB3_1: SB3.1 U4.3 | length 334.2
  Bottom Layer w10: SB3.1 6745.63,4835 6849.05,4835 6850.98,4836.93 6851.93,4836.93 6882.8,4867.8 6882.8,4891.11 6843.9,4930 U4.3
POS3V3: C7.2 CN1.17 J1.1 J3.4 P5.3 R1.2 R2.2 R5.1 R7.1 R8.1 R9.2 R10.2 R11.1 R20.1 R21.1 R24.2 R25.2 SB1.2 SB2.2 SB3.2 SB4.2 SB6.2 SB8.2 U4.8 U6.2 U7.16 | length 12720.3
  Top Layer w10: U7.16 U7.16@6450,4815 ; SB8.2 SB8.2@6835,4270
  Top Layer w40: v1(4025,3360) v1@4035,3360 ; v1(6380,4885) U7.16@6450,4815
  Top Layer w60: R24.2 3365.63,3350.63 3376.81,3350.63 3376.81,3366.1 3420.71,3410 v1(3450,3410) 3495,3410 3535.63,3369.37 R25.2 ; v1(4025,3360) 4025,3445 R21.1 R20.1 4660,3765 4830,3935 v1(4840,3935) 4840,3925 4893.72,3871.28 5071.32,3670 6441.85,3670 P5.3 ; v1@4035,3360 4347.24,3360 J1.1@4437.24,3270 ; SB4.2 6515.63,4264.37 v1(6555,4225) 6594.37,4264.37 SB6.2 ; v1(6755,4340) 6765,4340 SB8.2@6835,4270 ; v1(6895,4615) R10.2
  Bottom Layer w10: R5.1@3917.5,3138.76 R5.1@3920,3141.26 ; v1(4025,3360) 4025.63,3359.37 v1@4025.63,3339.37 ; R8.1@4198.74,4345.63 R8.1 ; v1@4835,3940 v1(4840,3935) ; P5.3@6555,3806.85 P5.3
  Bottom Layer w40: R7.1 v1@4025.63,3339.37 ; R11.1 R8.1@4198.74,4345.63 ; R8.1 4720.63,4329.37 4835,4215 J3.4 v1@4835,3940
  Bottom Layer w50: v1(6380,4885) 6380,4865 6555,4690 U6.2@6564.96,4690 ; U4.8 6635.51,5075.51 6735,5175 6883.77,5175 6965,5093.77 6965,4737.79 6922.84,4695.63 SB1.2 6889.37,4690 U6.2 ; U6.2@6564.96,4690 6564.96,4700.04 U6.2 ; U6.2@6564.96,4690 U6.2
  Bottom Layer w60: R9.2 R5.1@3917.5,3138.76 ; R5.1@3920,3141.26 3976.26,3141.26 4025.63,3190.63 R7.1 ; P5.3@6555,3806.85 v1(6555,4225) 6670,4340 v1(6755,4340) 6845,4340 6895,4390 v1(6895,4615) SB1.2
  Bottom Layer w70: CN1.17 CN1.17@3324.6,3680 ; R9.2 3781.14,3138.76 3744.53,3175.38 3744.53,3213.17 3712.69,3245 3390,3245 3450,3305 v1(3450,3410) 3335,3410 3250,3495 3250,3605.4 CN1.17@3324.6,3680 ; C7.2 4110,5235 3850.63,5494.37 R1.2 R2.2 3605,5570 3590,5585 3314.31,5585 3314.31,5513.58 3185,5384.27 3185,4726.01 3225,4686.01 3225,3779.6 CN1.17@3324.6,3680
POS5V: C5.1 C6.2 CN1.27 J1.2 U2.1 U3.3 | length 10580.3
  Top Layer w30: J1.2@4437.24,3170 J1.2@4440,3167.24
  Top Layer w50: CN1.27 3220,4570 3220,3330.56 3305,3245.56 3305,3138.74 3343.74,3100 4372.76,3100 J1.2@4440,3167.24
  Bottom Layer w10: CN1.27 3380,4630 4035,4630 4225,4820 4975,4820 4992.99,4802.01 U2.1
  Bottom Layer w40: J1.2@4437.24,3170 4522.24,3085 6335,3085 6420,3170 6420,3505.72 6385.72,3540 6050,3540 5990,3600 5990,3895 6240,4145 6240,4304.82 6015.18,4304.82 5890,4430 5890,4700 6075,4885 6210,4885 6265,4940 6265,4985 6290,5010 U3.3
  Bottom Layer w50: CN1.27 3255,4755 3255,5355.28 C6.2 C5.1
SD_CS: CN1.6 J3.2 R11.2 | length 1249.6
  Bottom Layer w10: CN1.6 4054.37,4480 R11.2 4320.63,4424.37 4370,4375 4750,4375 4921.61,4203.39 J3.2
SPI3_MISO: CN1.15 J1.21 J3.7 R7.2 | length 2854.6
  Top Layer w10: CN1.15 3930,3585 4315,3970 v1(4710,3970) ; v1(5265,3355) 5352.24,3355 J1.21@5437.24,3270
  Bottom Layer w10: CN1.15 4104.37,3405.63 R7.2 4120,3235 4240,3355 v1(5265,3355) ; v1(4710,3970) J3.7@4710,4045.08
SPI3_MOSI: CN1.14 J1.19 J3.3 R5.2 | length 3320.8
  Top Layer w10: CN1.14 4260,4010 4423.63,4010 4424.26,4009.37 4495.74,4009.37 4496.37,4010 4870,4010 v1(4900,3980)
  Bottom Layer w10: R5.2@3924.37,3235 3885.47,3273.9 3885.47,3635.47 CN1.14 4215,3395 5300,3395 5337.24,3357.76 J1.19@5337.24,3270 ; J3.3 4880,4058.31 4875,4053.31 4875,4043.47 4900,4018.47 v1(4900,3980)
SPI3_SCLK: CN1.16 J1.23 J3.5 R8.2 | length 4743.7
  Bottom Layer w10: CN1.16 3320,3580 3400,3660 3400,4081.72 3346.24,4135.47 3311.56,4135.47 3285.47,4161.56 3285.47,4198.44 3303.51,4216.49 3317.03,4230 3795,4230 3840,4275 3840,4375 3895,4430 3985,4430 4030,4385 4030,4295 4074.37,4250.63 R8.2 4534.37,4250.63 4535,4250 4725,4250 4791.69,4183.31 J3.5 4791.69,3953.26 4790,3951.57 4790,3875 4835,3830 4980,3830 5015,3865 5015,4205 5050,4240 5170,4240 5215,4195 5215,4095 5340,3970 5340,3500 5537.24,3302.76 J1.23@5537.24,3270
SPI3_SSEL: CN1.22 J1.24 R9.1 | length 3229.5
  Top Layer w10: v1(3690,3380) 3705,3380 3710,3385 3780,3315 4311.98,3315 4401.98,3225 4460,3225 4490,3195 4490,3145 4540,3095 5462.24,3095 J1.24@5537.24,3170
  Bottom Layer w10: CN1.22 3614.37,3895.63 3614.37,3455.63 3685,3385 3685,3299.37 3689.37,3295 3745.63,3295 R9.1
Therm1: CN1.9 P6.4 R24.1 | length 1554.2
  Top Layer w10: P6.4@3370,3160 P6.4 P6.4@3370,3173.5 ; R24.1 3444.37,3234.37 3383.5,3173.5 P6.4@3370,3173.5 ; CN1.9 3594.37,3844.37 3594.37,3529.37 3540,3475 3410,3475 3320.63,3385.63 3320.63,3286.5 3370,3237.13 P6.4@3370,3173.5
Therm2: CN1.10 P6.3 R25.1 | length 1110.5
  Top Layer w10: P6.3@3470,3160 3614.37,3304.37 R25.1 3614.37,3764.37 CN1.10
UART1_RX: CN1.7 J1.10 | length 3043.9
  Bottom Layer w10: CN1.7 3875,4325 3875,4260 3905,4230 3951.72,4230 3980,4201.72 3980,3671.72 4236.72,3415 5356.72,3415 5390,3381.72 5390,3259.78 5355.69,3225.47 4892.72,3225.47 J1.10@4837.24,3170
UART1_TX: CN1.8 J1.8 | length 3210.7
  Bottom Layer w10: CN1.8 4000,4210 4000,3680 4240,3440 5360,3440 5490,3310 5490,3155 5460.47,3125.47 4781.77,3125.47 J1.8@4737.24,3170
VBAT+: P3.2 U2.5 | length 618.7
  Bottom Layer w90: P3.2 4573.15,5256.85 4655,5175 4785,5175 4869.06,5090.94 4869.06,5010
VBAT-: P3.1 U2.6 | length 510.7
  Bottom Layer w90: P3.1 4989.06,5210.94 4989.06,5010
VIn: C2.2 CN1.30 U1.3 | length 1990.5
  Top Layer w70: CN1.30 3875,5525 v1(3980,5525)
  Bottom Layer w70: v1(3980,5525) 3982.59,5527.59 4089.82,5527.59 4285.01,5529.4 4320.6,5529.4 4460,5390 4460,5030 4498.5,4991.5 4560,4991.5 U1.3@4560,4891.5
VOLT_SENSE: CN1.24 R3.1 R4.2 | length 2419.7
  Top Layer w10: CN1.24 3790,4380 3845,4435 3985,4435 4025,4395 4880,4395 v1@5285,4800
  Bottom Layer w10: v1(5290,4785) 5385,4785 R3.1 R4.2
pads on no net: CN1.3 CN1.11 CN1.12 CN1.18 CN1.19 CN1.20 CN1.21 CN1.25 CN1.26 CN1.28 J1.3 J1.4 J1.5 J1.11 J1.12 J1.13 J1.16 J1.17 J1.18 J1.20 J1.22 J1.25 J1.26 J1.27 J1.28 J1.29 J1.30 J1.31 J1.32 J1.33 J1.34 J1.35 J1.36 J1.37 J1.38 J1.39 J1.40 J1.H J2.4 J2.8 J2.10 J2.11 J3.1 J3.8 U2.4 U2.7 U3.5 U4.7 U6.5 U6.6 U6.7 U6.8

## Silkscreen, mask and mechanical layers (free items; w line width, h text height)
Bottom Overlay:
  text "Curr+ Curr-" at 4510,5595 h30
  text "GND   LV+" at 4970,5595 h30
  text "GND  LV+" at 5445,5595 h30
  text "GND 3V3 SDA SCL" at 6840,3550 h50
  text "Badgerloop Control Panel V1.0" at 6305,3460 h70
  text "Vaughn Kottler" at 4085,3430 h60 r270
  text "Ryan Castle" at 4190,3430 h60 r270

## Text inside footprints (layer, text, board x,y; h text height)
CN1: Bottom Overlay "USB" at 3693.78,5161.1 h60; Bottom Overlay "RST" at 3709.53,3365.83 h60; Bottom Overlay "Nucleo-32" at 3571.73,3909.13 h100 r270
J1: Bottom Overlay "39" at 6370,3430 h60 r90; Bottom Overlay "1" at 4470,3360 h60 r90; Bottom Overlay "Raspberry Pi 3 B" at 6267.76,3365 h60
J2: Bottom Overlay "1" at 6630,5235 h20; Bottom Overlay "5" at 6210,5230 h30; Bottom Overlay "9" at 6249.17,5563.15 h59.06; Bottom Overlay "6" at 6576.34,5563.15 h59.06
J3: Bottom Overlay "Micro SD" at 4626.34,3989.13 h60 r180
U1: Top Overlay "OUT+" at 4851.34,4971.81 h60 r180; Top Overlay "IN+" at 5193.86,4971.81 h60 r180; Top Overlay "OUT-" at 4843.46,4538.74 h60 r180; Top Overlay "IN-" at 5193.86,4538.74 h60 r180; Top Overlay "Buck conv." at 5170.24,4739.53 h60 r180
U2: Bottom Overlay "-" at 5008.74,5007.8 h60; Bottom Overlay "+" at 4890.63,5007.8 h60; Bottom Overlay "<NC>" at 5000.87,4850.31 h39.37; Bottom Overlay "Out" at 4835.51,4747.95 h39.37; Bottom Overlay "5V" at 5087.48,4747.95 h39.37; Bottom Overlay "GND" at 4981.18,4677.09 h39.37
U6: Bottom Overlay "o" at 6289.96,4549.84 h60 r90